# Allegro board GPRS.brd
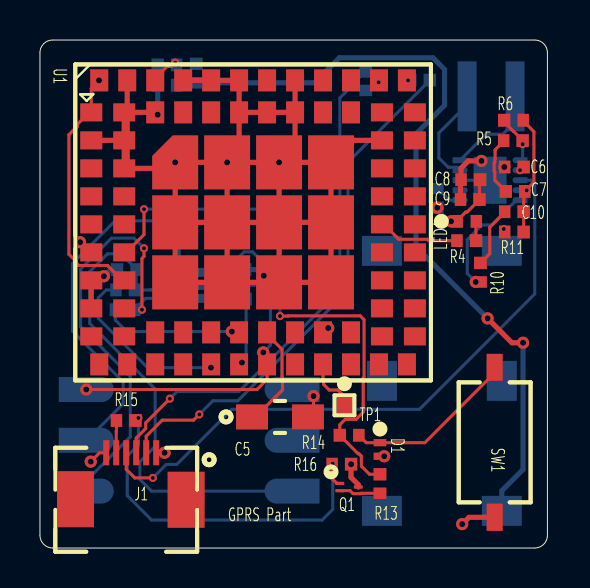
[diagram p0: board, top side]
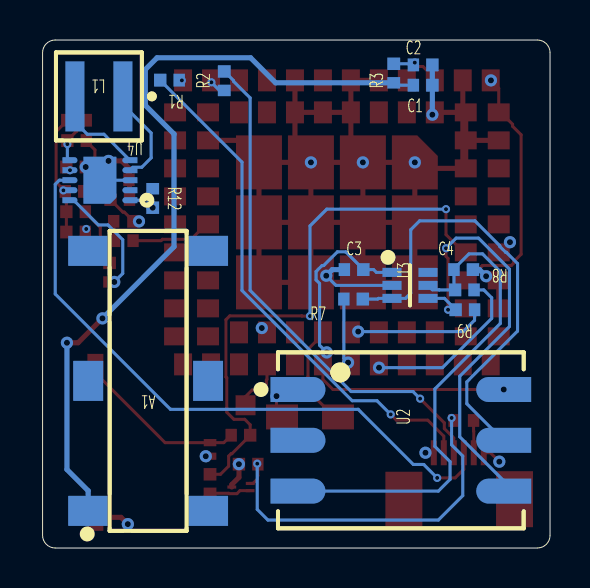
[diagram p1: board, bottom side, seen from below]

Outline 25.4 x 25.4 mm; copper layers: TOP, GND, POWER, BOTTOM. Coordinates in mm from the lower left corner of the outline.
Outline path: 0,24.77 0,0.63 arc(0.19,0.19) 0.63,0 24.77,0 arc(25.21,0.19) 25.4,0.63 25.4,24.77 arc(25.21,25.21) 24.77,25.4 0.63,25.4 arc(0.19,25.21) 0,24.77

## Placement (name value [footprint] x y rotation side)
A1  AN_SMD  [ANSMD_RAINSUN]  20.12 8.36 0 bottom
C1  27pF  [C0402]  6.35 23.14 180 bottom
C2  27pF  [C0402]  6.35 24.16 180 bottom
C3  1uF  [C0402]  9.8 13.92 180 bottom
C4  22pF  [C0402]  4.32 13.92 180 bottom
C5  100uF/6.3V  [3216-18]  12.01 6.55 0 top
C6  10uF  [C0402]  23.75 19.05 0 top
C7  100pF  [C0402]  23.77 17.83 180 top
C8  47uF  [C0402]  21.56 18.41 0 top
C9  100uF  [C0402]  21.54 17.42 0 top
C10  1nF  [C0402]  23.75 16.81 0 top
D1  -  [PESD5V0S1BL]  17.02 4.93 270 top
J1  SIM800_PORTS  [FPC_6PIN_0_5MM]  4.32 2.41 270 top
L1  15uH_COILCRAFT XAL4040  [XAL4040_153MEC]  22.58 22.58 0 bottom
LED1  GRE  [LED0402]  21.36 16.33 0 top
NOREF  -  []  0.63 25.4 0 top
NOREF#2  -  []  0 0.63 90 top
Q1  S9013-SOT-523  [SOT923]  15.47 3.05 0 top
R1  22R  [R0402]  19.05 23.39 0 bottom
R2  22R  [R0402]  16.31 23.37 90 bottom
R3  47nH  [R0402]  7.82 23.75 90 bottom
R4  330R  [R0402]  21.36 15.37 0 top
R5  15k  [R0402]  23.7 20.37 0 top
R6  845k  [R0402]  23.7 21.39 180 top
R7  22R  [R0402]  9.83 12.45 180 bottom
R8  22R  [R0402]  4.29 12.9 0 bottom
R9  22R  [R0402]  4.27 11.91 0 bottom
R10  49.9k  [R0402]  22.05 13.79 90 top
R11  169K  [R0402]  23.75 15.8 0 top
R12  332K  [R0402]  19.89 17.48 270 bottom
R13  0R  [R0402]  17.02 3.23 90 top
R14  0R  [R0402]  15.47 5.64 180 top
R15  4.7K  [R0402]  4.32 6.38 0 top
R16  47K  [R0402]  15.11 4.19 0 top
SW1  Switch_1  [SWITCH_2FOOT]  22.76 5.28 270 top
TP1  TP  [TP1]  15.24 7.14 0 top
U1  -  [SIM800L]  10.67 16.28 0 top
U2  SIM_Card  [SIM8050_NANOSIM]  7.47 5.38 180 bottom
U3  -  [SMF05C]  7.01 13.13 180 bottom
U4  -  [LTC3536]  22.53 18.39 0 bottom

## Library data of the parts
A1 = AN_SMD_0
C1-C4 = CAP-NP
C5 = CAP-POL
C6-C10 = CAP NP
D1 = DIODE BI-DIR TRIG
J1 = HEADER 6
L1 = L
LED1 = LED
Q1 = NPN
R1-R16 = R
SW1 = Switch_1
TP1 = TP
U1 = SIM800L
U2 = SIM_Card
U3 = SMF05C
U4 = LTC3536_1

## Footprints (pads in the part's own frame, mm; a bottom-side part is the same pattern mirrored in y, then rotated)
3216-18
  rect 1.6x1.25 smd: 1(-1.4,0) 2(1.4,0)
ANSMD_RAINSUN
  rect 2x1.5 smd: 1(3,6.5) 3(3,-6.5) 4(-3,-6.5) 6(-3,6.5)
  rect 1.5x2 smd: 2(3,0) 5(-3,0)
C0402
  rect 0.57x0.64 smd: 1(-0.49,0)
  rect 0.62x0.64 smd: 2(0.46,0)
FPC_6PIN_0_5MM
  rect 2.8x1.85 smd: (-0.025,-2.54) (0,2.997)
  rect 1.25x0.3 smd: 1(-2.35,1.5) 2(-2.35,1) 3(-2.35,0.5) 4(-2.35,0) 5(-2.35,-0.5) 6(-2.35,-1)
LED0402
  rect 0.57x0.64 smd: 1(-0.48,0) 2(0.48,0)
LTC3536
  custom 0.75x0.3 smd: 1(-1.5,1) 2(-1.5,0.5) 3(-1.5,0) 4(-1.5,-0.5) 5(-1.5,-1) 6(1.5,-1) 7(1.5,-0.5) 8(1.5,0) 9(1.5,0.5) 10(1.5,1)
  custom 1.65x2.35 smd: 11(0,0)
PESD5V0S1BL
  rect 0.36x0.63 smd: 1(-0.34,0) 2(0.34,0)
R0402
  rect 0.57x0.64 smd: 1(-0.49,0)
  rect 0.62x0.64 smd: 2(0.46,0)
SIM800L
  rect 1.1x0.9 smd: 1(-8.1,5.5) 2(-8.1,4.1) 3(-8.1,2.7) 4(-8.1,1.3) 5(-8.1,-0.1) 6(-8.1,-1.5) 7(-8.1,-2.9) 8(-8.1,-4.3) 9(-8.1,-5.7) 22(8.1,-5.7) 23(8.1,-4.3) 24(8.1,-2.9) 25(8.1,-1.5) 26(8.1,-0.1) 27(8.1,1.3) 28(8.1,2.7) 29(8.1,4.1) 30(8.1,5.5) 43(-6.45,5.5) 44(-6.45,4.1) 45(-6.45,2.7) 46(-6.45,1.3) 47(-6.45,-0.1) 48(-6.45,-1.5) 49(-6.45,-2.9) 50(-6.45,-4.3) 51(-6.45,-5.7) 60(6.45,-5.7) 61(6.45,-4.3) 62(6.45,-2.9) 63(6.45,-1.5) 64(6.45,-0.1) 65(6.45,1.3) 66(6.45,2.7) 67(6.45,4.1) 68(6.45,5.5)
  rect 0.9x1.1 smd: 10(-7.7,-7.1) 11(-6.3,-7.1) 12(-4.9,-7.1) 13(-3.5,-7.1) 14(-2.1,-7.1) 15(-0.7,-7.1) 16(0.7,-7.1) 17(2.1,-7.1) 18(3.5,-7.1) 19(4.9,-7.1) 20(6.3,-7.1) 21(7.7,-7.1) 31(7.7,7.1) 32(6.3,7.1) 33(4.9,7.1) 34(3.5,7.1) 35(2.1,7.1) 36(0.7,7.1) 37(-0.7,7.1) 38(-2.1,7.1) 39(-3.5,7.1) 40(-4.9,7.1) 41(-6.3,7.1) 42(-7.7,7.1) 52(-4.9,-5.5) 53(-3.5,-5.5) 54(-2.1,-5.5) 55(-0.7,-5.5) 56(0.7,-5.5) 57(2.1,-5.5) 58(3.5,-5.5) 59(4.9,-5.5) 69(4.9,5.5) 70(3.5,5.5) 71(2.1,5.5) 72(0.7,5.5) 73(-0.7,5.5) 74(-2.1,5.5) 75(-3.5,5.5) 76(-4.9,5.5)
  custom 2.3x2.7 smd: 77(-3.9,3)
  rect 2.3x2.7 smd: 78(-3.9,0) 79(-3.9,-3) 80(-1.3,-3) 81(1.3,-3) 82(3.9,-3) 83(3.9,0) 84(3.9,3) 85(1.3,3) 86(-1.3,3) 87(-1.3,0) 88(1.3,0)
SIM8050_NANOSIM
  custom 2.75x1.25 smd: 1(5.15,2.54) 2(5.15,0) 3(5.15,-2.54) 4(-5.15,2.54) 5(-5.15,0) 6(-5.15,-2.54)
SMF05C
  rect 0.95x0.45 smd: 1(-0.9,0.65) 2(-0.9,0) 3(-0.9,-0.65) 4(0.9,-0.65) 5(0.9,0) 6(0.9,0.65)
SOT923
  rect 0.44x0.16 smd: 1(0.46,0) 2(-0.46,0.18) 3(-0.46,-0.18)
SWITCH_2FOOT
  rect 1.35x0.8 smd: 1(-3.75,0) 2(3.75,0)
TP1
  rect 1x1 smd: 1(0,0)
XAL4040_153MEC
  rect 0.95x3.5 smd: 1(-1.2,0) 2(1.2,0)

## Nets
DGND: C1.2 C2.2 C3.1 C4.2 C5.2 C6.1 C8.1 C9.1 D1.2 J1.6 Q1.1(EMITTER) R11.1 R12.2 R16.2 SW1.2 U1.2(GND#2) U1.6(GND#6) U1.7(VBUS) U1.8(GND#8) U1.35(GND#35) U1.37(GND#37) U1.38(GND#38) U1.39(GND#39) U1.41(GND#41) U1.43(GND#43) U1.44(GND#44) U1.45(GND#45) U1.58(GND#58) U1.67(GND#67) U1.71(GND#71) U1.72(GND#72) U1.73(GND#73) U1.76(GND#76) U1.77(GND#77) U1.78(GND#78) U1.79(GND#79) U1.80(GND#80) U1.81(GND#81) U1.82(GND#82) U1.83(GND#83) U1.84(GND#84) U1.85(GND#85) U1.86(GND#86) U1.87(GND#87) U1.88(GND#88) U2.4(GND) U3.2 U4.3(MODE) U4.11(TGND)
DVBAT: C8.2 C9.2 LED1.1(ANODE) R5.2 R6.2 U1.1(VBAT#1) U1.42(VBAT#42) U1.49(RESET) U4.6(VOUT)
GND: U4.2(GND)
VDDEXT: TP1.1 U1.18(VDDEXT)
BAT_IN: C6.2 J1.1 U4.7(VIN)
LTC_CS: J1.4 U4.8(/SHDN)
SIM800_PK: J1.5 R15.1
SIM800_RXD: R1.1 U1.31(RXD)
SIM800_TXD: R2.1 U1.32(TXD)
SIM_CLK: R9.2 U2.3(CLK) U3.4
SIM_DATA: C4.1 R8.2 U2.6(IO) U3.5
SIM_RST: R7.2 U2.2(RST) U3.3
UART_RXD: J1.3 R2.2
UART_TXD: J1.2 R1.2
VSIM: C3.2 U1.16(VSIM) U2.1(VCC) U3.1
N146191: C2.1 R3.2 U1.40(ANT)
N146293: A1.1(ANT) C1.1 R3.1
N146603: Q1.2(BASE) R15.2 R16.1
N147317: R8.1 U1.14(SIM_DATA)
N147327: R9.1 U1.55(SIM_CLK)
N147331: R7.1 U1.15(SIM_RST)
N150191: LED1.2(CATHODE) R4.2
N150220: R4.1 U1.64(NETLIGHT)
N152885: L1.1 U4.4(SW1)
N157914: L1.2 U4.5(SW2)
N158121: C7.1 C10.2 R6.1 R11.2 U4.9(FB)
N158128: C7.2 R5.1
N158437: R10.1 U4.10(VC)
N158809: R12.1 U4.1(RT)
N172774: R13.2 R14.2 U1.48(PWRKEY)
N172788: Q1.3(COLLECTOR) R13.1
N173555: D1.1 R14.1 SW1.1
N176229: C10.1 R10.2
N1468130: C5.1 U1.56(VRTC)

Pads without a net: A1 2 3 4 5 6; U1 3 4 5 9 10 11 12 13 17 19 20 21 22 23 24 25 26 27 28 29 30 33 34 36 46 47 50 51 52 53 54 57 59 60 61 62 63 65 66 68 69 70 74 75; U2 5; U3 6

## Via types
v1: diameter 0.61, hole 0.305, TOP to BOTTOM, 27 vias
v2: diameter 0.406, hole 0.203, TOP to BOTTOM, 16 vias

## Routing (per net, layer and track width the routed paths; a pad name or vN(x,y) marks a point on that pad's centre or on a via; arc(x,y) is an arc through that point)
DGND: length 101.6
  TOP w0.152: J1.6 2.99,4.76 v1(2.54,4.32) ; R11.1 23.22,15.8 23.11,15.9 23.36,15.9 R11.1 ; R11.1 23.26,15.91 v2(23.22,15.95) ; C5.2 13.69,6.83 v1(13.69,7.59)
  TOP w0.254: U1.8 U1.7 2.74,13.38 2.95,13.59 v1(3.2,13.59) ; U1.2 U1.44 ; U1.44 U1.45 ; U1.44 U1.43 U1.76 ; U1.80 U1.81 ; U1.80 U1.87 ; U1.80 U1.79 U1.78 ; U1.81 U1.88 ; U1.81 U1.82 U1.83 ; SW1.2 21.47,1.53 v1(21.13,1.19) ; U1.87 v1(9.37,19.28) ; U1.87 U1.78 ; U1.87 U1.88 ; U1.45 4.37,19.13 U1.41 ; U1.45 6.47,18.98 v1(6.77,19.28) ; Q1.1 15.93,3.17 15.57,3.53 15.57,4.19 v1(15.57,4.19) ; U1.73 U1.37 U1.38 U1.39 ; U1.73 9.97,19.88 v1(9.37,19.28) ; U1.73 U1.72 U1.71 ; U1.6 2.52,14.78 v1(2.01,15.29) ; v1(6.77,19.28) v1(9.37,19.28) ; v1(6.77,19.28) U1.78 ; C9.1 21.05,18.39 C8.1 21.07,18.99 21.44,19.35 v1(22.1,19.35) ; v1(14.43,11) 14.3,11 14.17,10.87 U1.58 ; v1(9.37,19.28) v1(11.97,19.28) ; v1(11.97,19.28) 12.77,20.08 U1.71 ; v1(11.97,19.28) U1.84 ; v1(11.97,19.28) U1.88 ; U1.88 U1.83 ; U1.83 U1.84 ; U1.71 U1.35 ; U1.84 15.67,20.38 U1.67 ; D1.2 v1(17.23,4.59)
  BOTTOM w0.152: U3.2 10.72,13.13 v1(11.2,13.61) ; U2.4 13.36,7.92 v1(13.69,7.59) ; U4.3 U4.11 22.58,18.39 v1(23.24,19.05)
  BOTTOM w0.254: C4.2 3.53,13.92 v1(3.2,13.59) ; C2.2 C1.2 v1(5.89,21.67) ; v1(11.2,13.61) 10.9,13.92 C3.1
  vias: v1(19.89,17.02)
DVBAT: length 18.1
  TOP w0.152: U1.49 4.12,13.38 3.71,13.79 3.71,13.8 3.41,14.1 3.4,14.1 3.37,14.13 1.93,14.13 1.81,14.25 1.81,14.32 1.45,14.69 1.45,20.66 1.87,21.09 1.87,21.19 2.47,21.78 U1.1 2.57,22.98 U1.42 v1(2.96,23.38) ; v1(20.57,16.33) LED1.1 20.88,16.37 21.31,16.8 21.38,16.8 22,17.41 C9.2 22,18.39 C8.2 ; v2(24.16,20.2) R5.2 24.16,20.38 23.7,20.83 23.69,20.83 23.24,21.29 R6.2
  BOTTOM w0.152: U4.6 24.16,19.52 v2(24.16,20.2)
VDDEXT: length 2.7
  TOP w0.152: U1.18 14.17,8.43 14.2,8.4 14.2,8.18 14.48,7.9 14.91,7.9 15.24,7.57 TP1.1
BAT_IN: length 24.7
  TOP w0.152: J1.1 v1(6.24,4.76) ; v2(24.03,18.89) 24.38,18.89 24.22,19.05 C6.2
  POWER w0.152: v2(24.03,18.89) 9.9,4.76 v1(6.24,4.76)
  BOTTOM w0.152: U4.7 v2(24.03,18.89)
LTC_CS: length 31.6
  TOP w0.152: J1.4 4.32,3.93 4.75,3.51 v2(5.65,3.51)
  BOTTOM w0.152: v2(5.65,3.51) 6.32,4.18 6.84,4.18 9.6,6.93 19,6.93 24.77,12.7 24.77,18.19 24.56,18.39 U4.8
SIM800_PK: length 1.6
  TOP w0.152: R15.1 3.83,5.85 3.82,5.84 J1.5
SIM800_RXD: length 0.1
  TOP w0.152: U1.31 v2(18.43,23.38)
SIM800_TXD: length 0.8
  BOTTOM w0.152: 16.92,23.28 v2(16.95,23.28) 16.54,22.88 R2.1
SIM_CLK: length 22.2
  TOP w0.152: v2(5.21,14.99) 5.21,14.58 5.11,14.48 v2(5.11,11.91)
  BOTTOM w0.152: v2(5.11,11.91) R9.2 4.73,11.92 5.29,12.48 U3.4 ; v2(5.21,14.99) 4.7,15.49 3.58,15.49 2.03,13.94 2.03,11.07 4.52,8.59 4.52,5.56 2.32,3.36 U2.3
SIM_DATA: length 25.4
  BOTTOM w0.152: U3.5 5.89,12.91 5.55,12.91 5.54,12.9 R8.2 4.81,12.96 C4.1 4.81,13.95 4.06,14.71 3.38,14.71 2.49,13.82 2.49,11.23 5.77,7.95 5.77,5.08 5,4.32 5,3.43 5.59,2.84 U2.6
SIM_RST: length 22.8
  BOTTOM w0.152: R7.2 8.62,12.45 8.59,12.48 U3.3 7.23,12.48 6.97,12.74 6.97,15.91 6.53,16.36 3.76,16.36 2.51,15.11 2.51,15.08 2.22,14.78 2.18,14.78 1.63,14.22 1.63,10.85 4.17,8.31 4.17,7.21 2.34,5.38 U2.2
UART_RXD: length 25.6
  TOP w0.152: J1.3 4.82,5.5 5.29,5.97 5.29,6.26 v2(6.5,7.47)
  BOTTOM w0.152: v2(6.5,7.47) 6.86,7.82 9.96,7.82 15.01,12.88 15.01,22.5 15.84,23.34 15.84,23.37 16.3,23.83 R2.2
UART_TXD: length 26.2
  TOP w0.152: J1.2 5.32,5.59 6.12,6.39 7.69,6.39 v2(7.98,6.68)
  BOTTOM w0.152: v2(7.98,6.68) 8.66,7.36 9.9,7.36 15.42,12.88 15.42,19.29 19.51,23.38 R1.2
VSIM: length 19.6
  TOP w0.152: v1(2.32,7.92) 10.86,7.92 11.37,8.43 U1.16 11.15,9.4 11.15,9.75 v1(11.18,9.78)
  BOTTOM w0.152: U3.1 8.69,13.78 8.83,13.92 C3.2 9.34,13.93 10.22,14.81 10.64,14.81 11.33,14.12 11.41,14.12 11.71,13.82 11.71,13.4 11.54,13.23 11.54,10.14 v1(11.18,9.78)
N146191: length 2.6
  TOP w0.152: U1.40 5.77,23.48 6.36,24.08 6.57,24.08 v2(6.77,24.27)
  BOTTOM w0.152: v2(6.77,24.27) 6.77,24.23 C2.1 6.89,24.21 R3.2
N146293: length 39.9
  TOP w0.254: v1(22.4,11.48) 23.62,10.26 v1(24.18,10.26)
  BOTTOM w0.152: C1.1 7.7,23.14 R3.1
  BOTTOM w0.254: v1(24.18,10.26) 24.18,3.92 23.12,2.86 A1.1 ; R3.1 13.73,23.26 14.99,24.51 19.67,24.51 20.25,23.93 20.25,22.13 18.82,20.7 18.82,15.06 v1(22.4,11.48)
N146603: length 18.8
  TOP w0.152: R15.2 4.8,6.38 v2(4.93,6.5) ; Q1.2 14.87,3.23 14.64,3.45 14.64,3.59 14.62,3.61 R16.1
  BOTTOM w0.152: v2(4.93,6.5) 4.93,5.16 4.37,4.6 4.37,2.62 5.59,1.4 14.12,1.4 14.66,1.93 v2(14.66,4.22)
N147317: length 8.7
  BOTTOM w0.152: R8.1 3.31,12.9 2.92,12.51 2.92,11.48 5.38,9.02 v1(8.56,9.02)
N147327: length 6.6
  BOTTOM w0.152: v1(9.6,10.82) 4.35,10.82 3.78,11.39 R9.1
N147331: length 3.3
  BOTTOM w0.152: v1(10.11,9.27) 10.32,9.48 R7.1
N150191: length 1
  TOP w0.152: R4.2 21.82,16.31 LED1.2
N150220: length 4.1
  TOP w0.152: U1.64 17.22,16.18 17.96,15.43 19.4,15.43 19.47,15.37 R4.1
N152885: length 5
  BOTTOM w0.152: L1.1 21.38,22.17 19.96,20.75 19.96,19.51 20.44,19.04 20.88,19.04 U4.4
N157914: length 4.8
  BOTTOM w0.152: U4.5 22.33,20.69 23.16,20.69 23.78,21.31 L1.2
N158121: length 6.1
  TOP w0.152: R6.1 24.19,21.35 24.72,20.82 24.72,18.29 24.32,17.88 ; v2(24.36,17.88) 24.32,17.88 ; 24.32,17.88 C7.1 24.21,17.78 C10.2 R11.2
N158128: length 3
  TOP w0.152: C7.2 23.31,17.84 22.77,18.38 22.77,18.8 22.73,18.84 22.73,19.26 22.77,19.3 22.77,19.45 22.78,19.46 22.78,19.91 23.21,20.34 R5.1
N158437: length 6
  TOP w0.152: R10.1 v1(21.81,13.3)
  BOTTOM w0.152: U4.10 23.84,17.39 22.61,16.15 22.13,16.15 21.39,15.41 21.39,13.73 v1(21.81,13.3)
N158809: length 1.4
  BOTTOM w0.152: R12.1 19.92,17.97 20.5,17.39 U4.1
N172774: length 28.3
  TOP w0.152: R13.2 16.49,3.69 16.09,4.09 16.09,4.6 15.97,4.71 15.92,4.71 15.01,5.63 R14.2 15.01,6.16 15.28,6.43 15.82,6.43 16.18,6.79 16.18,8.51 16.22,8.55 16.22,11.42 16.03,11.61 12.43,11.61 12.42,11.6 v2(12.01,11.6) ; v2(5.21,16.94) 5.21,15.67 4.32,14.78 U1.48
  BOTTOM w0.152: v2(12.01,11.6) 12.01,16.1 11.18,16.94 v2(5.21,16.94)
N172788: length 2.1
  TOP w0.152: Q1.3 15.52,2.87 15.67,2.72 16.07,2.72 16.08,2.74 R13.1
N173555: length 8.7
  TOP w0.152: SW1.1 22.76,8.76 19.27,5.27 D1.1 16.33,5.27 R14.1
N176229: length 3.1
  TOP w0.152: R10.2 22.06,14.25 22.51,14.71 22.51,16.03 23.26,16.78 C10.1
N1468130: length 5.3
  TOP w0.152: C5.1 10.79,6.55 12.14,7.91 12.14,8.52 12.11,8.55 12.11,9.93 11.37,10.68 U1.56

## Copper pours and planes (outline as drawn; the poured copper is in the pictures)
DGND on GND: 0.63,0.53 0.56,0.56 0.53,0.63 0.53,24.77 0.56,24.84 0.63,24.87 24.77,24.87 24.84,24.84 24.87,24.77 24.87,0.63 24.84,0.56 24.77,0.53
DVBAT on POWER: 0.63,0.53 0.56,0.56 0.53,0.63 0.53,24.77 0.56,24.84 0.63,24.87 24.77,24.87 24.84,24.84 24.87,24.77 24.87,0.63 24.84,0.56 24.77,0.53

## Text on the board
Ref Des/Silkscreen Top: GPRS Part
DIMENSION: FIGURE | SIZE | 8.0 | 12.0 | DRILL CHART: TOP to BOTTOM | ALL UNITS ARE IN MILS | PLATED | QTY | 16 | 27
